# Altium PCB 403-Buck-2.PcbDoc
Units mil, origin at the board's own origin, x right, y up, seen from the top; angles counter-clockwise.
Board outline 2960.03 x 1690.03 mil, 2 copper layers (Top Layer, Bottom Layer); 19 components, 14 nets, 47 pads, 10 vias.
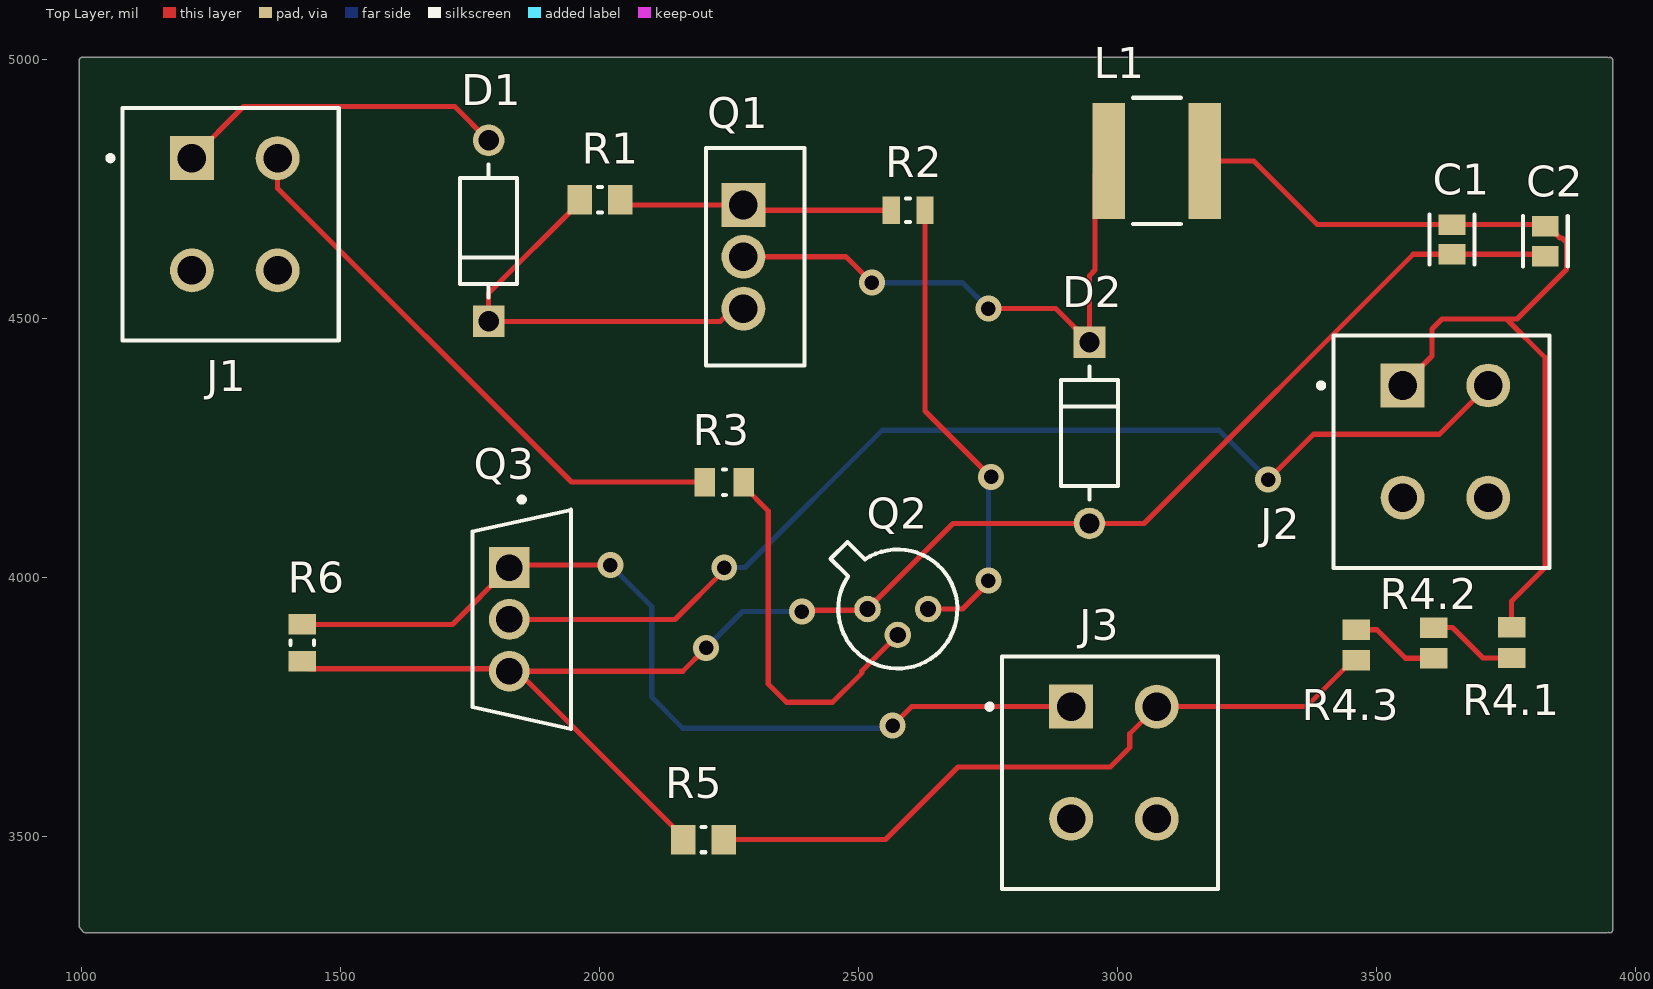
[diagram p0: Top Layer view]
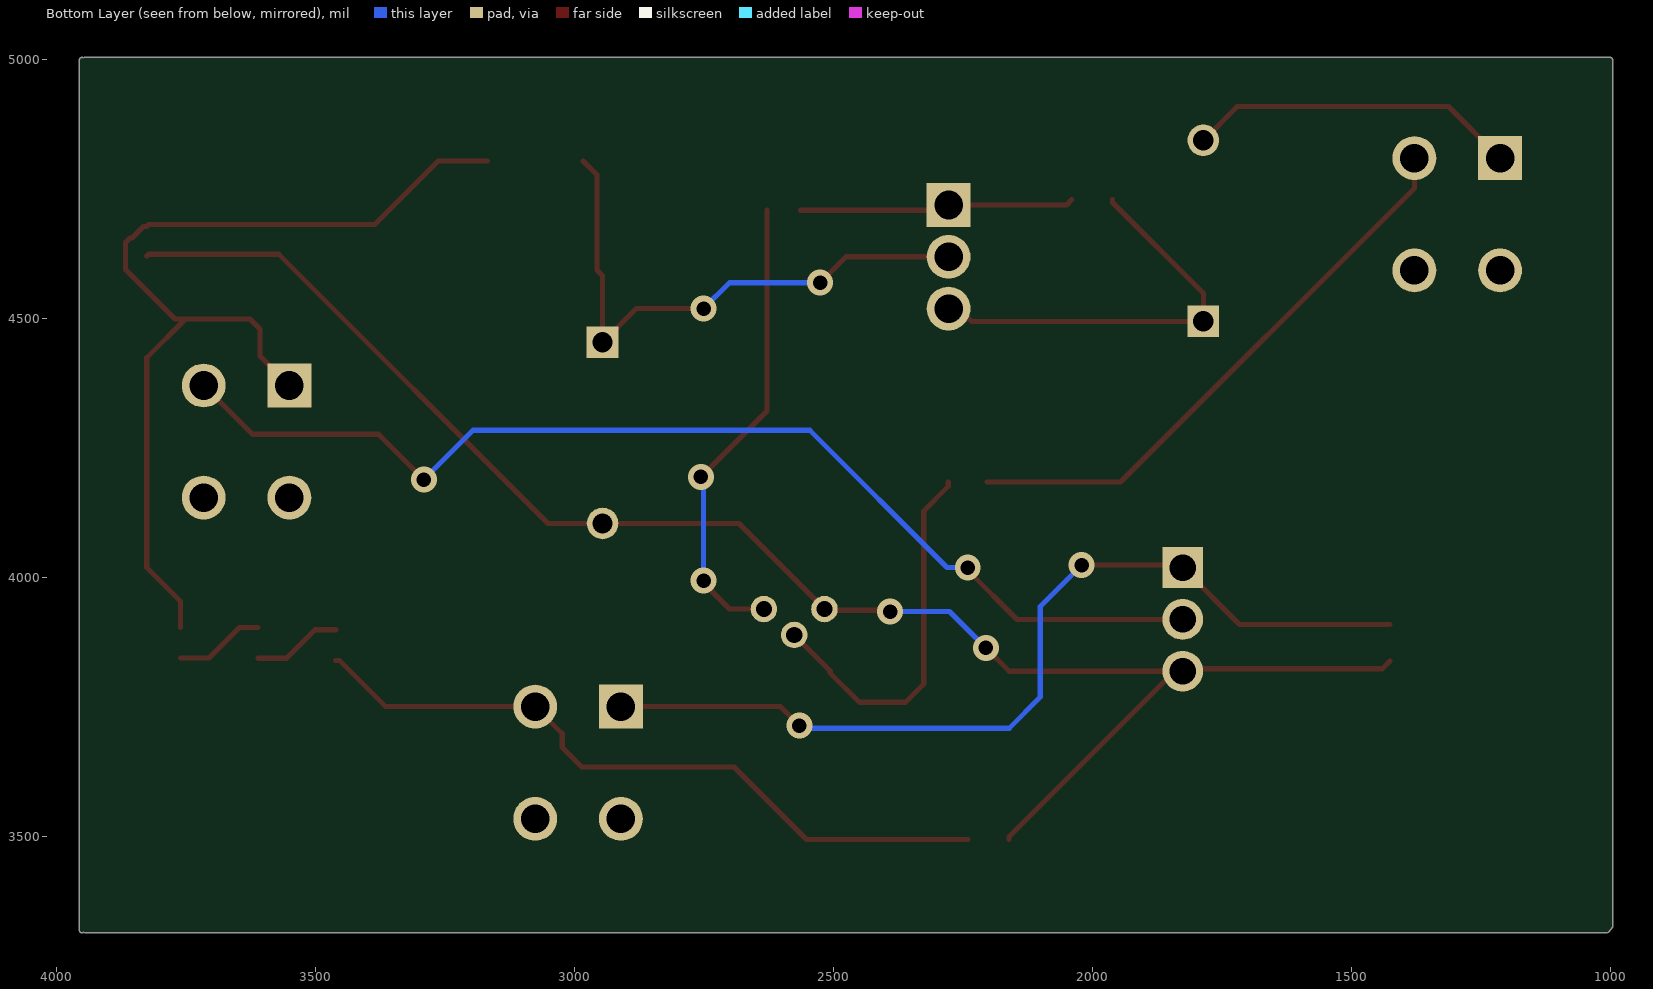
[diagram p1: Bottom Layer view, seen from below]
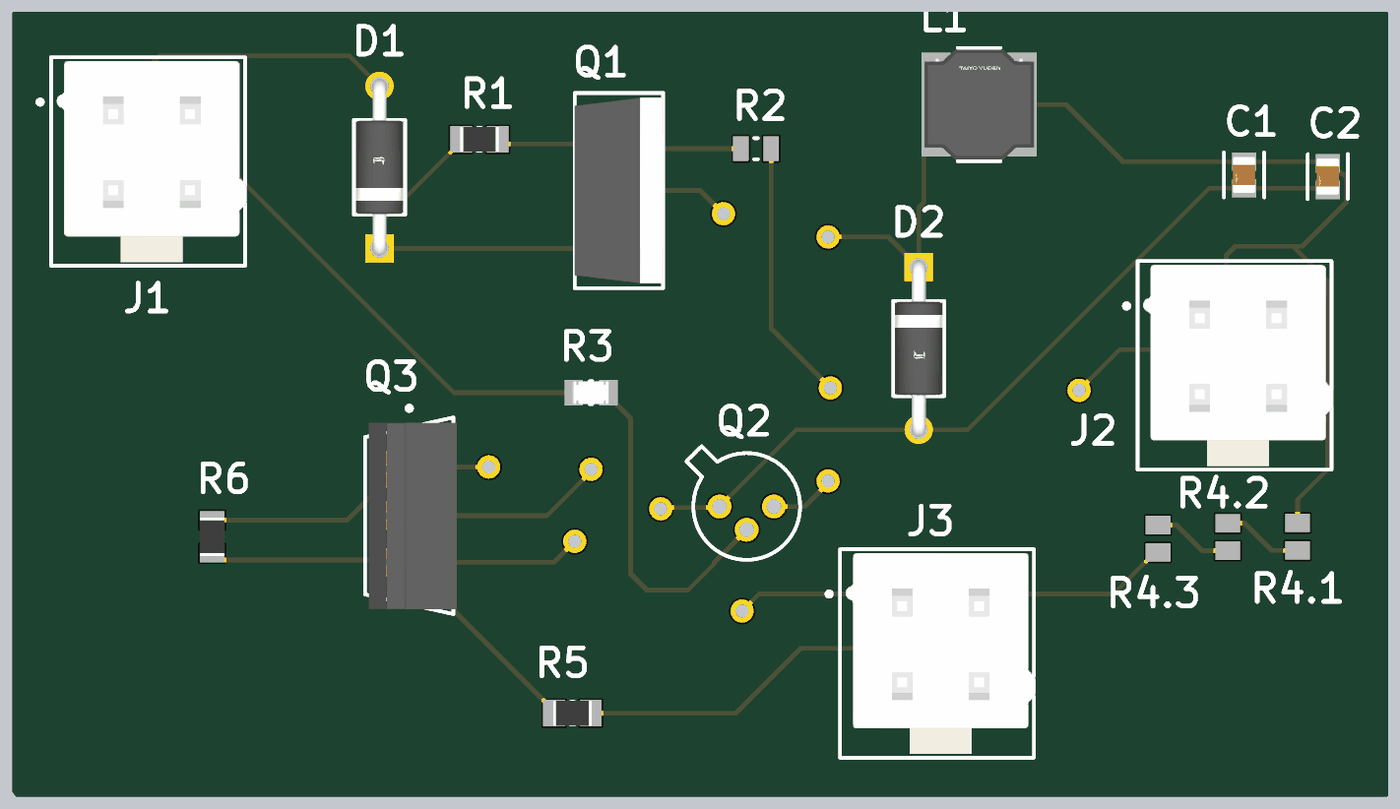
[diagram p2: 3D render of the assembled board from above, using the file's embedded part models]

## Layer stack, top to bottom
Top Solder: solder mask 0.4, Solder Resist, Dk 3.5
Top Layer: signal copper 1.4
Dielectric 1: dielectric 12.6, FR-4, Dk 4.8
Bottom Layer: signal copper 1.4
Bottom Solder: solder mask 0.4, Solder Resist, Dk 3.5

## Board outline
994.99,3325.86 994.99,5000 cw(c1000,5000) 1000,5005.02 3945,5005.02 3947.5,5004.35 cw(c3950,5000) 3955.01,5000 3955.01,3320 cw(c3950,3320) 3947.07,3315.93 3944.14,3314.99 1005.86,3314.99 1002.31,3316.45

## Design rules (kind name [scope] priority, off if disabled: settings)
Clearance [All] p1: gap=10 ignorepadtopadclearanceinfootprint=FALSE except(0: Arc-Hole Track-Hole SMDPad-Hole THPad-Hole Via-Hole Fill-Hole Poly-Hole Region-Hole Text-Hole)
PolygonConnect [All] p1: connectstyle=Relief reliefconductorwidth=10 reliefentries=4 polygonreliefangle="90 Angle" airgapwidth=10
RoutingVias [All] p1: holewidth=28 width=50 viastyle="Through Hole" minholewidth=28 minwidth=50 maxholewidth=28 maxwidth=50
SolderMaskExpansion [All] p1: expansion=4 istentingtop=FALSE
Width [All] p1: maxlimit=10 minlimit=10 preferedwidth=10
30 further rules are at their usual default settings.

## Classes and differential pairs
component class Circuit1: C1 C2 D1 D2 J1 J2 J3 Q1 Q2 Q3 R1 R2 R3 R4.1 R4.2 R4.3 R5 R6

## Components (designator, comment, footprint, x,y, rotation, side; value= is the part's Value field where it differs from the comment)
C1 "GRM21BR61E106KA73L" FP-GRM21B-0_15-IPC_C 3645,4653.59 r270 top
C2 "GRM21BR61E106KA73L" FP-GRM21B-0_15-IPC_C 3825,4650 r270 top
D1 "1N4007" FP-1N4007-MFG 1785,4670 r90 top value=15pF
D2 "1N4007" FP-1N4007-MFG 2945,4280 r270 top value=15pF
J1 "0039281043" FP-0039281043-MFG 1295,4710 r0 top
J2 "0039281043" FP-0039281043-MFG 3632.32,4271.14 r0 top
J3 "0039281043" FP-0039281043-MFG 2992.32,3651.14 r0 top
L1 "NRS6045T101MMGK" FP-NR6045-MFG 3075,4805 r0 top
Q1 "IRF9540NLPBF" FP-PG-TO262-3-MFG 2300,4620 r0 top
Q2 "2N2222" MLTC-TO-18-3 2575,3940 r0 top
Q3 "IRF1010EPBF" FP-PG-TO220-3-MFG 1849.02,3920 r0 top
R1 "RC0805FR-071KL" RESC2013X60X35ML10T20 2000,4730 r0 top
R2 "CRCW0805470RFKEA" RESC2013X50X30LL20T20 2595,4710 r0 top
R3 "CRCW08052K00FKEA" FP-CRCW0805-e3-IPC_B 2240,4185 r0 top
R4.1 "ERA6AEB302V" RESC2013X60X40LL20T25 3760,3875 r270 top
R4.2 "ERA6AEB302V" RESC2013X60X40LL20T25 3610,3874.53 r270 top
R4.3 "ERA6AEB302V" RESC2013X60X40LL20T25 3460,3870.47 r270 top
R5 "RC0805FR-071KL" RESC2013X60X35ML10T20 2200,3495 r180 top
R6 "RC0805FR-0710KL" RESC2013X60X35NL10T20 1425,3875 r270 top

## Footprints (in the part's own frame and the unit in brackets; to place one, negate y for a bottom-side part, rotate by r counter-clockwise, add the part's x,y. Pads: shape width x height; smd on the part's side, far side on the other; paste and mask are expansions set on the pad)
FP-1N4007-MFG [mm]
  rect 1.55x1.55 hole 1 paste-1000 mask+0: 1(-4.44,0)
  round 1.55 hole 1 paste-1000 mask+0: 2(4.44,0)
  silkscreen extent -3.26,-1.4 3.26,1.4, body extent -5.32,-1.5 5.32,1.5, height 0.25
FP-0039281043-MFG [mm]
  rect 2.15x2.15 hole 1.4 paste-1000 mask+0: 1(-2.1,2.55)
  round 2.15 hole 1.4 paste-1000 mask+0: 2(2.1,2.55) 3(-2.1,-2.95) 4(2.1,-2.95)
  silkscreen extent -6.22,-6.4 5.1,5, body extent -5.6,-6.5 5.8,5.1, height 0.25
FP-CRCW0805-e3-IPC_B [mil]
  rect 39.63x55.44 smd paste+0 mask+0: 1(-37.44,0) 2(37.44,0)
  silkscreen extent -3,-25 3,25, body extent -67,-38 67,38, height 10
FP-GRM21B-0_15-IPC_C [mil]
  rect 39.6x51.5 smd paste+0 mask+0: 1(-28.59,0) 2(28.59,0)
  silkscreen extent -48,-43 48,43, body extent -39,-25 39,25, height 55
FP-NR6045-MFG [mm]
  rect 1.6x5.7 smd paste+0 mask+0: 1(-2.35,0) 2(2.35,0)
  silkscreen extent -1.17,-3.1 1.17,3.1, body extent -3.25,-3.2 3.25,3.2, height 0.25
FP-PG-TO220-3-MFG [mm]
  rect 2x2 hole 1.3 paste-1000 mask+0: 1(-0.61,2.54)
  round 2 hole 1.3 paste-1000 mask+0: 2(-0.61,0) 3(-0.61,-2.54)
  silkscreen extent -2.41,-5.38 2.41,6, body extent -2.51,-5.6 2.51,5.6, height 0.25
FP-PG-TO262-3-MFG [mm]
  rect 2.15x2.15 hole 1.4 paste-1000 mask+0: 1(-0.583,2.54)
  round 2.15 hole 1.4 paste-1000 mask+0: 2(-0.583,0) 3(-0.583,-2.54)
  silkscreen extent -2.41,-5.34 2.41,5.34, body extent -2.51,-5.44 2.51,5.44, height 0.25
MLTC-TO-18-3 [mm] "TO-18, 3-Leads"
  round 1.3 hole 0.8: 1(-1.485,0) 2(0,-1.27) 3(1.485,0)
  silkscreen extent -3.29,-2.92 2.92,3.29, body extent -3.29,-2.93 2.93,3.29, height 5.33
RESC2013X50X30LL20T20 [mm] "Chip Resistor, 2-Leads, Body 2.00x1.25mm, IPC High Density"
  rect 0.85x1.35 smd: 1(-0.825,0) 2(0.825,0)
  silkscreen extent -0.1,-0.58 0.1,0.58, body extent -1.1,-0.72 1.1,0.72, height 0.5
RESC2013X60X35ML10T20 [mm] "Chip Resistor, 2-Leads, Body 2.1x1.35mm, IPC Low Density"
  rect 1.2x1.45 smd: 1(-1,0) 2(1,0)
  silkscreen extent -0.1,-0.63 0.1,0.63, body extent -1.05,-0.68 1.05,0.67, height 0.6
RESC2013X60X35NL10T20 [mm] "Chip Resistor, 2-Leads, Body 2.1x1.35mm, IPC Medium Density"
  rect 1x1.35 smd: 1(-0.9,0) 2(0.9,0)
  silkscreen extent -0.1,-0.58 0.1,0.58, body extent -1.05,-0.68 1.05,0.67, height 0.6
RESC2013X60X40LL20T25 [mm] "Chip Resistor, 2-Leads, Body 2.00x1.25mm, IPC High Density"
  rect 1x1.35 smd: 1(-0.75,0) 2(0.75,0)
  body extent -1.1,-0.72 1.1,0.72, height 0.6

## Part data
C1 C2: library part CMP-2007-03541-2, "Chip Multilayer Ceramic Capacitors for General Purpose, 0805, 10uF, X5R, 15%, 10%, 25V", Capacitance=10uF, Case Code (Imperial)=0805, Case Code (Metric)=2012, Dielectric=X5R, Max Operating Temperature=85°C, Min Operating Temperature=-55°C, Package Quantity=1, Tolerance=10%, Voltage=25V, Case/Package=0805, Depth=1.25mm, Height=1.25mm, Lead Free="Lead Free", Length=2mm, Material=Ceramic, Mount="Surface Mount", Packaging="Tape and Reel", Radiation Hardening=No, Termination=SMD/SMT, Thickness=0.053inch, Voltage Rating=25V, Voltage Rating (DC)=25V, Width=0.049inch
D1 D2: library part CMP-123542-000001-1, "Rectifier diode 1000 V 1 A DO-41, ,", Capacitance=15pF, Forward Current=1A, Manufacturer=Diotec, Max Junction Temp=+175°C, Max Repetitive Reverse Voltage=1000V, Max Surge Forward Current=27A, Peak Reverse Current=5uA, Temperature="-50°C to +175°C", Temperature Range Low=-50°C, Automotive=No, Category=Diode, ComponentLink2Description=Datasheet, ComponentLink2URL=https://datasheet.octopart.com/1N4007-Diotec-datasheet-62346875.pdf, Device Class L1="Discrete Semiconductors", Device Class L2=Diodes, Device Class L3="Rectifier Diodes", Height=2.8mm, Ipc Land Pattern Name=DIOAD888W100L520D280, Lead Free=Yes, Manufacturer Part Number=1N4007, Octopart=https://octopart.com/1n4007-diotec-4040411, Package=1N4007, Reverse Voltage=1000V, RoHS=TRUE, Temperature Range High=+175°C
J1 J2 J3: library part CMP-04776-000046-1, "CONN HEADER VERT 4POS 4.2MM", Current Rating=9A, Manufacturer=Molex, Package=0, Temperature="-40°C to +105°C", Temperature Range High=+105°C, Temperature Range Low=-40°C, Voltage Rating=600V, Automotive=No, Category=Conn, ComponentLink2Description=Datasheet, ComponentLink2URL=https://www.molex.com/webdocs/datasheets/pdf/en-us/0039281043_PCB_HEADERS.pdf, Conn Gender=Male, Conn Orientation=Vertical, Contact Material=Tin, Device Class L1=Connectors, Device Class L2="Headers and Wire Housings", Device Class L3=unset, Digikey Description="CONN HEADER VERT 4POS 4.2MM", Footprint Url=https://www.molex.com/pdm_docs/sd/039281043_sd.pdf, Height=13.1mm, Lead Free=Yes, Manufacturer Part Number=0039281043, Number Of Contacts=4, Number Of Rows=2, Octopart=https://octopart.com/39-28-1043-molex-7613, Pitch=4.2mm, RoHS=TRUE
L1: library part CMP-14484-001089-1, "Shielded Wirewound Inductor 100uH 20% 0.9A 0.6058Ω SMD", Case/Package=6045, Current Rating=750mA, DC Resistance (DCR)=605.8mR, Inductance=100uH, Inductance Tolerance=20%, Max DC Current=900mA, Max Operating Temperature=125°C, Min Operating Temperature=-25°C, Package Quantity=1500, Resistor Type=Wirewound, Self Resonant Frequency=3MHz, Test Frequency=100kHz, Core Material=Ferrite, Depth=6.2mm, Halogen Free="Halogen Free", Height=4.5mm, Height - Seated (Max)=0.177inch, Lead Free="Lead Free", Lead Pitch=4.7mm, Length=6mm, Mount="Surface Mount", Number of Pins=2, Packaging="Tape and Reel", Radiation Hardening=No, RMS Current (Irms)=750mA, RoHS Compliant=Yes, Saturation Current=900mA, Series=NRS, Shielding=Shielded, Termination=SMD/SMT, Tolerance=20%, Width=0.236inch
Q1: library part CMP-32901-000518-1, "MOSFET P-CH 100V 23A TO262-3", Case/Package=TO-262, Continuous Drain Current (ID)=23A, Drain to Source Resistance=117mR, Drain to Source Voltage (Vdss)=-100V, Gate to Source Voltage (Vgs)=20V, Input Capacitance=1.45nF, Max Operating Temperature=150°C, Max Power Dissipation=3.1W, Min Operating Temperature=-55°C, Power Dissipation=110W, Threshold Voltage=4V, Halogen Free="Not Halogen Free", Height=0.38inch, Lead Free="Contains Lead", Length=0.42inch, Max Dual Supply Voltage=-100V, Mount="Through Hole", Number of Channels=1, Number of Pins=3, Packaging=Rail/Tube, Rds On Max=117mR, REACH SVHC="No SVHC", Rise Time=67ns, RoHS Compliant=Yes, Turn-Off Delay Time=40ns, Turn-On Delay Time=13ns, Width=0.19inch
Q2: library part CMP-2000-05237-1, "Low Power Bipolar NPN Transistor, 30 V, -65 to 200 degC, 3-Pin TO-18, RoHS, Bulk", Collector Emitter Voltage V(br)ceo=30V, Collector Emitter Voltage Vces=400mV, Continuous Collector Current Ic Max=800mA, Current Ic @ Vce Sat=150mA, DC Current Gain hFE=100, Full Power Rating Temperature=25degC, Manufacturer=Multicomp, Package / Case=TO-18, Package Description="3-Pin Transistor Outline Package (TO-18), Dia 5.54 mm, Pitch Pitch 1.485mm", Package Reference=TO-18-3, Power Dissipation Pd=500mW, Voltage Vcbo=60V, Current Ic Continuous a Max=800mA, Current Ic hFE=150mA, Datasheet URL=http://www.farnell.com/datasheets/1662272.pdf, Datasheet Version="Rev. 1.1, 05/2012", DC Collector Current=800mA, Gain Bandwidth ft Min=250MHz, Gain Bandwidth ft Typ=250MHz, Hfe Min=100, Manufacturer URL=http://uk.farnell.com/b/multicomp, No. of Pins=3, No. of Transistors=1, Pin Configuration=a, Power Dissipation Ptot Max=500mW, SVHC=NoSVHC(19-Dec-2012), Transistor Case Style=TO-18, Transistor Polarity=NPN
Q3: library part CMP-32901-000559-1, "MOSFET N-CH 60V 84A TO-220AB", Case/Package=TO-220, Continuous Drain Current (ID)=84A, Drain to Source Breakdown Voltage=60V, Drain to Source Resistance=12mR, Gate to Source Voltage (Vgs)=20V, Input Capacitance=3.21nF, Max Operating Temperature=175°C, Max Power Dissipation=200W, Min Operating Temperature=-55°C, Threshold Voltage=4V, Contact Plating=Tin, Drain to Source Voltage (Vdss)=60V, Element Configuration=Single, Halogen Free="Not Halogen Free", Height=0.65inch, Lead Free="Lead Free", Length=0.42inch, Max Dual Supply Voltage=60V, Mount="Through Hole", Number of Pins=3, Packaging=Rail/Tube, Power Dissipation=200W, Rds On Max=12mR, REACH SVHC="No SVHC", Rise Time=78ns, RoHS Compliant=Yes, Turn-Off Delay Time=48ns, Turn-On Delay Time=12ns, Width=0.19inch
R1 R5: library part CMP-2100-03671-1, "Chip Resistor, 1 KOhm, +/- 1%, 125 mW, -55 to 155 degC, 0805 (2012 Metric), RoHS, Tape and Reel", Case Code (Imperial)=0805, Case Code (Metric)=2012, Manufacturer=Yageo, Max Operating Temperature=155degC, Max Power Dissipation=125mW, Min Operating Temperature=-55degC, Package Description="2-Pin Surface Mounted Device, Body 2 x 1.25 mm", Package Quantity=1, Resistance=1KOhm, Temperature Coefficient=100ppm/degreesC, Tolerance=1%, Voltage Rating=150V, Case/Package=0805, Composition=ThickFilm, Datasheet URL=http://www.yageo.com/NewPortal/yageodocoutput?fileName=/pdf/R-Chip/PYu-RC_Group_51_RoHS_L_5.pdf, Datasheet Version="Rev. 5, 10/2016", Depth=1.25mm, Height=0.024inch, Lead Free=LeadFree, Length=0.079inch, Manufacturer URL=http://www.yageo.com/, Military Standard=Not, Number of Pins=2, Number of Terminations=2, Package Reference=0805, Packaging=TapeandReel, Power Rating=125mW, REACH SVHC=Unknown, RoHSCompliant=true, Termination=SMD/SMT, Voltage Rating (DC)=150V, Width=0.049inch
R2: library part CMP-2001-03932-1, Manufacturer="Vishay Dale", Part Number=CRCW0805470RFKEA
R3: library part CMP-2001-03755-2, "RES Thick Film, 2kΩ, 1%, 0.125W, 100ppm/°C, 0805", Case Code (Imperial)=0805, Case Code (Metric)=2012, Max Operating Temperature=155°C, Max Power Dissipation=125mW, Min Operating Temperature=-55°C, Package Quantity=10, Resistance=2kR, Temperature Coefficient=100ppm/°C, Tolerance=1%, Voltage Rating=150V, Case/Package=0805, Composition="Thick Film", Contact Plating=Tin, Depth=1.25mm, Features="Automotive AEC-Q200", Height=0.02inch, Lead Free="Lead Free", Length=2mm, Military Standard=Not, Mount="Surface Mount", Number of Pins=2, Number of Terminals=2, Number of Terminations=2, Packaging="Tape and Reel", Power Rating=125mW, Radiation Hardening=No, Termination=SMD/SMT, Voltage Rating (DC)=150V, Weight=0.000194oz, Width=1.25mm, Working Voltage=150V
R4.1 R4.2 R4.3: library part CMP-2001-00625-1, Manufacturer=Panasonic, Part Number=ERA6AEB302V
R6: library part CMP-1659-00013-4, "Chip Resistor, 10 KOhm, +/- 1%, 0.125 W, -55 to 155 degC, 0805 (2012 Metric), RoHS, Tape and Reel", Manufacturer=Yageo, Max Operating Temperature="155 degC", Min Operating Temperature="-55 degC", Package Quantity=5000, Voltage Rating="150 V", ComponentLink1Description="Manufacturer URL", ComponentLink1URL=http://www.yageo.com/, ComponentLink2Description=Datasheet, ComponentLink2URL=http://www.yageo.com/documents/recent/PYu-RC_Group_51_RoHS_L_04.pdf, DatasheetVersion="Rev. 4, 02/2016", Height="0.5 mm", Length="2 mm", Mount="Surface Mount", Mounting Technology="Surface Mount", PackageDescription="2-Pin Surface Mounted Device, Body 2 x 1.25 mm", PackageReference=0805, Packaging="Tape and Reel", Pins=2, REACH SVHC="No SVHC", RoHSCompliant=true

## Via types
v1: diameter 50, hole 28, Top Layer to Bottom Layer, 10 vias

## Nets (pads, with @x,y where several pads share a name; then routed paths per layer and width w, separated by ;. In a path a pad name is that pad's centre, name@x,y a point inside that pad or via, vN(x,y) a via of type N, cw(c..) or ccw(c..) an arc to the next point about the centre after c; other vN are vias at no path point)
GND: C1.2 C2.2 D2.2 Q2.1 Q3.3 R5.2 R6.2 | length 3200.6
  Top Layer w10: R6.2 1439.69,3824.88 1820.12,3824.88 Q3.3 Q3.3@1840.55,3820 ; R5.2 2160.63,3499.92 Q3.3@1840.55,3820 ; v1(2205,3865) 2160,3820 Q3.3@1840.55,3820 ; v1(2390,3935) 2392.5,3937.5 2514.04,3937.5 Q2.1 2681.73,4105.2 D2.2 3050.2,4105.2 3570,4625 C1.2 3821.41,4625 C2.2
  Bottom Layer w10: v1(2205,3865) 2275,3935 v1(2390,3935)
NetC1_1: C1.1 C2.1 J2.1 L1.2 R4.1.1 | length 1908.4
  Top Layer w10: L1.2 3262.05,4805 3384.86,4682.18 C1.1 3821.41,4682.18 C2.1 3830.95,4678.59 3853.34,4656.21 3856.97,4656.21 3865.75,4647.42 3865.75,4595.4 3770.36,4500 3750,4500 ; J2.1 3606.41,4428.3 3606.41,4480.56 3625.86,4500 3750,4500 ; R4.1.1 3760,3955 3825,4020 3825,4425 3750,4500
NetD1_1: D1.1 Q1.3 R1.1 | length 809.9
  Top Layer w10: R1.1 1960.63,4725.08 1785,4549.45 D1.1 2232.06,4495.2 2256.87,4520 Q1.3
NetD1_2: D1.2 J1.1 | length 640.9
  Top Layer w10: J1.1 1311.93,4910 1719.8,4910 D1.2
NetD2_1: D2.1 L1.1 Q1.2 | length 1102.1
  Top Layer w10: Q1.2 2475,4620 v1(2525,4570) ; v1(2750,4520) 2879.8,4520 D2.1 2945,4583.56 2955.98,4594.55 2955.98,4778.5 L1.1
  Bottom Layer w10: v1(2525,4570) 2700,4570 v1(2750,4520)
NetJ1_2: J1.2 R3.1 | length 1118
  Top Layer w10: J1.2 1377.68,4752.32 1945,4185 R3.1
NetJ2_2: J2.2 Q3.2 | length 2158.7
  Top Layer w10: Q3.2 2145,3920 2240,4015 v1(2240,4020) ; v1(3290,4190) 3377.45,4277.45 3620.92,4277.45 J2.2
  Bottom Layer w10: v1(2240,4020) 2280,4020 2545,4285 3195,4285 v1(3290,4190)
NetJ3_1: J3.1 Q3.1 R6.1 | length 1782.3
  Top Layer w10: R6.1 1715.43,3910.43 Q3.1 1830,4025 v1(2020,4025) ; v1(2565,3715) 2601.54,3751.54 J3.1
  Bottom Layer w10: v1(2020,4025) 2100,3945 2100,3770 2160,3710 2560,3710 v1(2565,3715)
NetJ3_2: J3.2 R4.3.2 R5.1 | length 1379.5
  Top Layer w10: R5.1 2551.5,3495 2691.5,3635 2985,3635 3022.86,3672.86 3022.86,3699.39 J3.2 3363.7,3751.54 3453.11,3840.94 R4.3.2
NetQ1_1: Q1.1 R1.2 R2.1 | length 531.4
  Top Layer w10: R1.2 2049.37,4720 Q1.1 2287.07,4710 R2.1
NetQ2_2: Q2.2 R3.2 | length 730.5
  Top Layer w10: R3.2 2277.44,4177.09 2325,4129.53 2325,3795 2360,3760 2449.14,3760 2505.35,3816.2 2505.35,3820.35 Q2.2
NetQ2_3: Q2.3 R2.2 | length 912.1
  Top Layer w10: R2.2 2627.48,4322.52 v1(2755,4195) ; Q2.3 2700,3940 2750,3990 v1(2750,3995)
  Bottom Layer w10: v1(2750,3995) 2750,4190 v1(2755,4195)
NetR4.1_2: R4.1.2 R4.2.1 | length 174.3
  Top Layer w10: R4.2.1 3645.94,3904.06 3704.53,3845.47 R4.1.2
NetR4.2_2: R4.2.2 R4.3.1 | length 172.8
  Top Layer w10: R4.3.1 3500,3900 3555,3845 R4.2.2
pads on no net: J1.3 J1.4 J2.3 J2.4 J3.3 J3.4

## Other copper
Top Layer:

## Silkscreen, mask and mechanical layers (free items; w line width, h text height)
Board Outline:
  lines w10: 1000,3325.86 1000,5000 3945,5000 ; 1005.86,3320 3944.14,3320 ; 3950,3320 3950,5000